# Allegro board B07_1106_1.brd
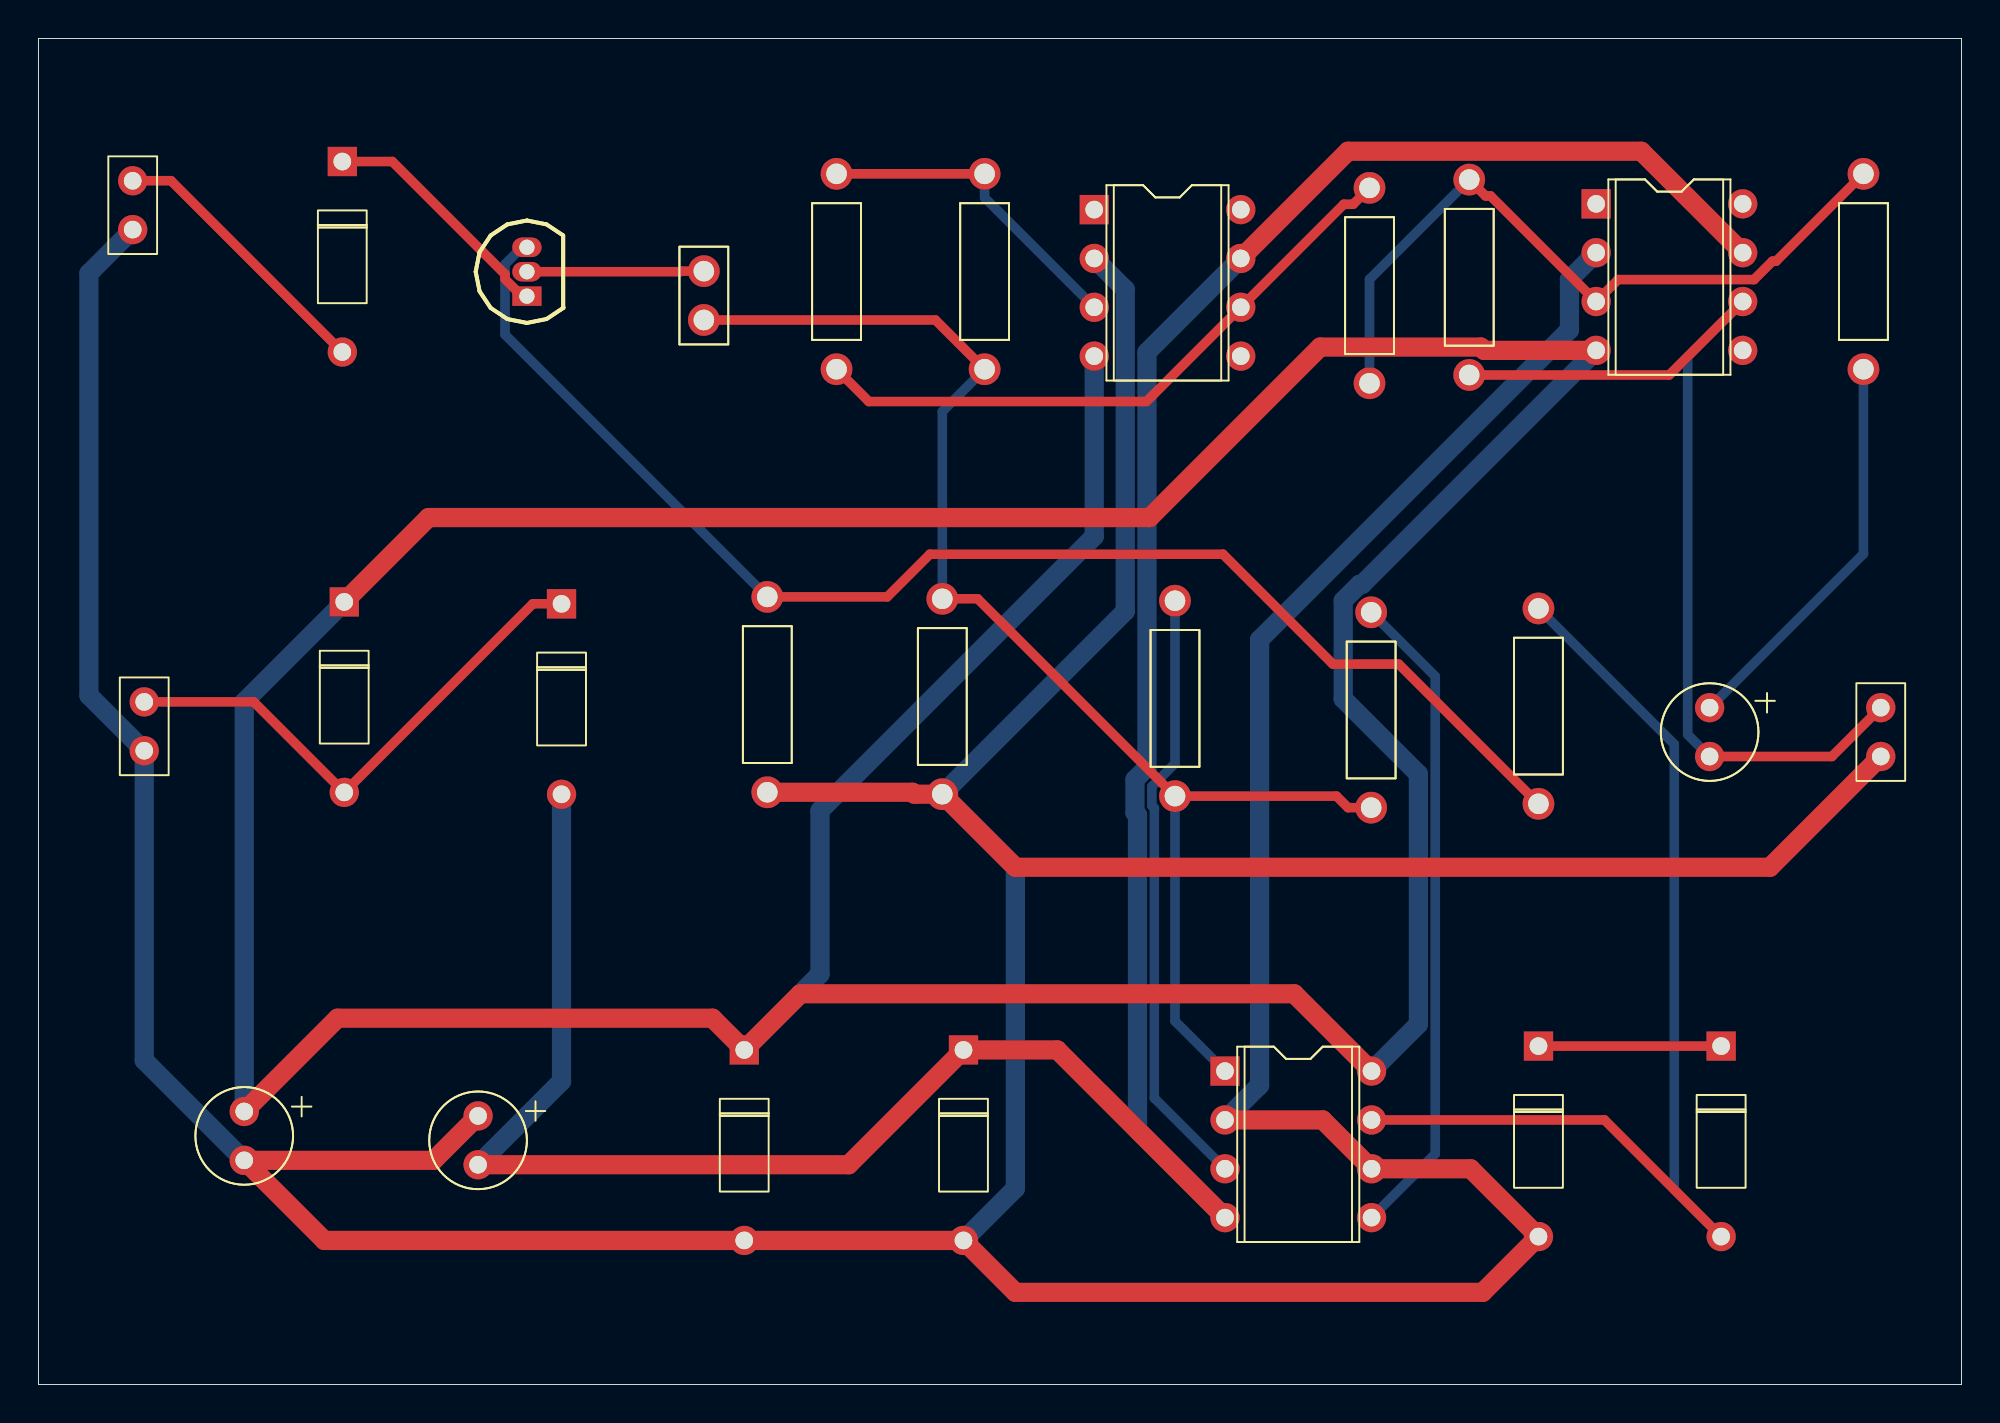
[diagram p0: board, top side]
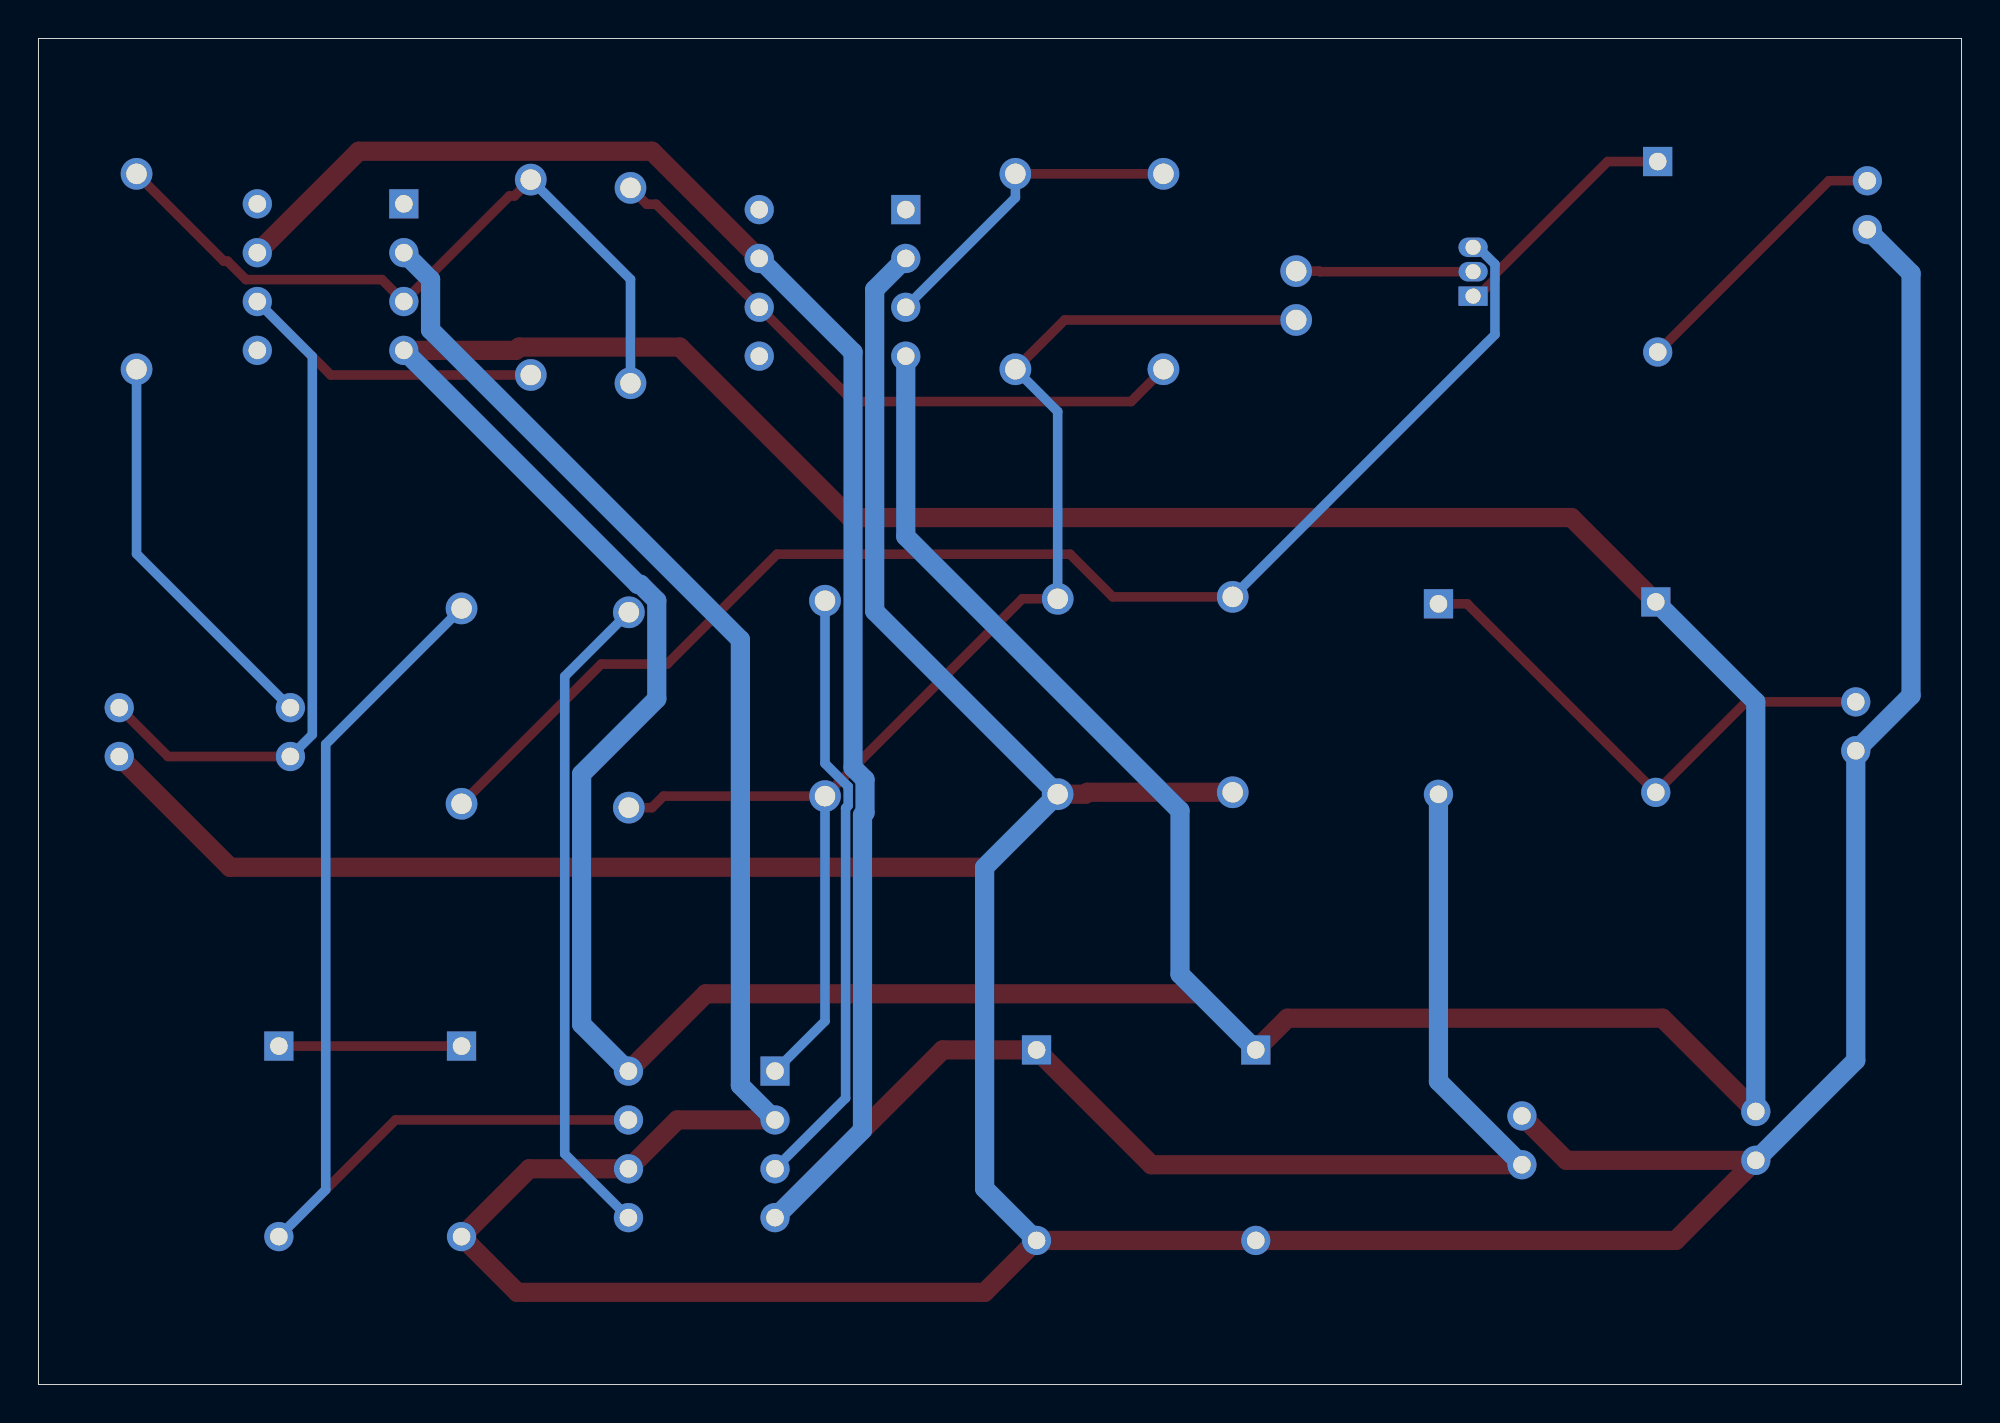
[diagram p1: board, bottom side, seen from below]

Outline 100 x 70 mm; copper layers: TOP, BOTTOM. Coordinates in mm from the lower left corner of the outline.
Outline path: 0,70 0,0 100,0 100,70 0,70

## Design rules (mm)
constraint set DEFAULT: min track width 0.5
nets with their own width: min track width 1; nets +9V -9V GND

## Placement (name value [footprint] x y rotation side)
C1  C  [CAP196]  86.9 35.2 180 top
C2  CAP NP  [CAPCK05]  34.6 57.9 180 top
C3  C  [CAP196]  10.7 14.2 180 top
C4  C  [CAP196]  22.86 13.97 180 top
D1  DIODE  [DO41]  15.8 63.6 180 top
D2  DIODE ZENER  [DO41]  87.5 17.6 180 top
D3  DIODE  [DO41]  15.9 40.7 180 top
D4  DIODE ZENER  [DO41]  78 17.6 180 top
D5  DIODE ZENER  [DO41]  36.7 17.4 180 top
D6  DIODE ZENER  [DO41]  48.1 17.4 180 top
D7  DIODE  [DO41]  27.2 40.6 180 top
J1  CON2  [JUMPER2]  95.8 35.2 270 top
J2  CON2  [JUMPER2]  4.9 62.6 270 top
J3  CON2  [JUMPER2]  5.5 35.5 270 top
NOREF  -  []  0 28.55 0 top
NOREF#2  -  []  33.21 0 90 top
Q1  JFET N  [TO92]  25.4 56.6 90 top
R1  R  [RES400]  74.4 52.5 0 top
R2  R  [RES400]  94.9 52.8 0 top
R3  R  [RES400]  41.5 52.8 0 top
R4  R  [RES400]  49.2 52.8 0 top
R5  R  [RES400]  69.22 52.07 0 top
R6  R  [RES400]  37.9 30.8 0 top
R7  R  [RES400]  47 30.7 0 top
R8  R  [RES400]  59.1 30.6 0 top
R9  R  [RES400]  69.3 30 0 top
R10  R  [RES400]  78 30.2 0 top
U1  LM741  [DIP8_3]  54.9 61.1 0 top
U2  LM741  [DIP8_3]  81 61.4 0 top
U3  LF153  [DIP8_3]  61.7 16.3 0 top

## Library data of the parts
C1 = C_2: Tolerance: ***; User Part Number: ***
C2 = CAP NP: Tolerance: ***; User Part Number: ***
C3 = C_3: Tolerance: ***; User Part Number: ***
C4 = C_4: Tolerance: ***; User Part Number: ***
D1 D3 D7 = DIODE
D2 D4 D5 = DIODE ZENER
D6 = DIODE ZENER_1
J1-J3 = CON2: User Part Number: ***
Q1 = JFET N
R1-R10 = R: Tolerance: ***; User Part Number: ***
U1 U2 = LM741_0: Tolerance: ***; User Part Number: ***
U3 = LF153: Tolerance: ***; User Part Number: ***

## Footprints (pads in the part's own frame, mm; a bottom-side part is the same pattern mirrored in y, then rotated)
CAP196
  round 1.524 hole 0.914: 1(0,0) 2(0,2.54)
CAPCK05
  round 1.651 hole 1.067: 1(0,0) 2(0,2.54)
DIP8_3
  rect 1.524x1.524 hole 0.914: 1(0,0)
  round 1.524 hole 0.914: 2(0,-2.54) 3(0,-5.08) 4(0,-7.62) 5(7.62,-7.62) 6(7.62,-5.08) 7(7.62,-2.54) 8(7.62,0)
DO41
  rect 1.524x1.524 hole 0.914: 1(0,0)
  round 1.524 hole 0.914: 2(0,9.906)
JUMPER2
  round 1.524 hole 0.914: 1(0,0) 2(2.54,0)
RES400
  round 1.651 hole 1.067: 1(0,0) 2(0,10.16)
TO92
  rect 1.016x1.524 hole 0.787: 1(0,0)
  oval 1.016x1.524 hole 0.787: 2(1.27,0) 3(2.54,0)

## Nets
+9V: C3.1 D3.1(K) D5.1(CATHODE) U1.4(V-) U2.4(V-) U3.8
-9V: C4.2 D6.1 D7.2 U1.7 U2.7 U3.4
GND: C3.2 C4.1 D4.2 D5.2 D6.2(CATHODE) J1.2 J2.2 J3.2 R6.1 R7.1 U1.2 U2.2 U3.2 U3.6
N01292: D1.2 J2.1
N01508: D1.1(K) Q1.1
N01512: Q1.3(SOURCE) R6.2 R10.1
N01516: C2.1 Q1.2
N01523: C2.2 R4.1 R7.2 R8.1 R9.1 U3.1
N01548: R3.2 R4.2 U1.3
N01577: R3.1 R5.2 U1.6
N01598: R1.2 R2.2 R5.1 U2.3
N01655: C1.1 R2.1
N01659: C1.2 J1.1 R1.1 U2.6
N01894: R8.2 U3.3
N01970: R9.2 U3.5
N02022: D2.2 R10.2 U3.7(OUT)
N02026: D2.1(CATHODE) D4.1(CATHODE)
N02260: D3.2 D7.1(K) J3.1

Pads without a net: U1 1 5 8; U2 1 5 8

## Routing (per net, layer and track width the routed paths; a pad name or vN(x,y) marks a point on that pad's centre or on a via; arc(x,y) is an arc through that point)
+9V: length 252.8
  TOP w1: U2.4 75.17,53.78 75,53.95 66.65,53.95 57.78,45.09 20.29,45.09 D3.1 ; C3.1 15.55,19.05 35.05,19.05 D5.1 39.62,20.32 65.3,20.32 U3.8
  BOTTOM w1: U2.4 68.83,41.61 68.7,41.61 67.85,40.76 67.85,35.66 71.75,31.75 71.75,18.73 U3.8 ; D3.1 10.7,35.5 C3.1 ; U1.4 54.9,44.1 40.64,29.84 40.64,21.34 D5.1
-9V: length 150.7
  TOP w1: U1.7 68.09,64.14 83.34,64.14 U2.7 ; C4.2 42.13,11.43 D6.1 52.98,17.4 U3.4
  BOTTOM w1: U1.7 57.64,53.68 57.64,32.08 57.02,31.46 57.02,29.74 57.15,29.61 57.15,13.23 U3.4 ; C4.2 27.2,15.77 D7.2
GND: length 329.3
  TOP w1: U3.2 66.78,13.76 U3.6 74.47,11.22 D4.2 75.1,4.79 50.8,4.79 D6.2 D5.2 14.87,7.49 C3.2 20.55,11.66 C4.1 ; R6.1 45.45,30.8 45.55,30.7 R7.1 50.8,26.9 90.04,26.9 J1.2
  BOTTOM w1: D6.2 50.8,10.19 50.8,26.9 R7.1 56.52,40.22 56.52,56.95 U1.2 ; C3.2 5.5,16.86 J3.2 2.62,35.84 2.62,57.78 J2.2 ; U2.2 79.61,57.47 79.61,54.85 63.5,38.73 63.5,15.56 U3.2
N01292: length 14.6
  TOP w0.5: J2.1 6.89,62.6 D1.2
N01508: length 12.6
  TOP w0.5: D1.1 18.4,63.6 24.26,57.74 24.26,57.48 25.15,56.6 Q1.1
N01512: length 70.8
  TOP w0.5: R6.2 44.13,40.96 46.35,43.18 61.59,43.18 67.31,37.47 70.73,37.47 R10.1
  BOTTOM w0.5: R6.2 24.26,54.6 24.26,58.26 25.15,59.14 Q1.3
N01516: length 9.2
  TOP w0.5: C2.1 33.4,57.9 33.37,57.87 Q1.2
N01523: length 70.7
  TOP w0.5: R9.1 68.1,30 67.5,30.6 R8.1 48.84,40.86 R7.2 ; R4.1 46.64,55.36 C2.2
  BOTTOM w0.5: R8.1 59.1,18.9 U3.1 ; R7.2 47,50.6 R4.1
N01548: length 17
  TOP w0.5: R3.2 R4.2
  BOTTOM w0.5: U1.3 49.2,61.72 R4.2
N01577: length 33
  TOP w0.5: R5.2 68.36,61.38 67.88,61.38 U1.6 57.62,51.12 43.18,51.12 R3.1
N01598: length 38.6
  TOP w0.5: R2.2 90.36,58.42 90.17,58.42 89.21,57.46 82.14,57.46 U2.3 75.51,61.81 75.25,61.81 R1.2
  BOTTOM w0.5: R5.1 69.22,57.48 R1.2
N01655: length 20.9
  BOTTOM w0.5: R2.1 94.9,43.2 C1.1
N01659: length 51.1
  TOP w0.5: J1.1 93.26,32.66 C1.2 ; R1.1 84.8,52.5 U2.6
  BOTTOM w0.5: C1.2 85.76,33.8 85.76,53.46 U2.6
N01894: length 31.6
  BOTTOM w0.5: R8.2 59.1,32.3 57.9,31.1 57.9,30.1 58.03,29.97 58.03,14.89 U3.3
N01970: length 34.2
  BOTTOM w0.5: R9.2 72.63,36.83 72.63,11.99 U3.5
N02022: length 57.3
  TOP w0.5: D2.2 81.43,13.76 U3.7
  BOTTOM w0.5: D2.2 85.06,10.13 85.06,33.3 R10.2
N02026: length 9.5
  TOP w0.5: D4.1 D2.1
N02260: length 27.7
  TOP w0.5: D7.1 25.71,40.6 D3.2 11.19,35.5 J3.1

## Text on the board
DEVICE_TYPE_TOP: FIGURE | FINISHED_SIZE | 0.7874 | 0.9144 | 1.0668 | DRILL CHART: TOP to BOTTOM | ALL UNITS ARE IN MILLIMETERS | PLATED | QTY | 3 | 50 | 22
